# Altium PCB PCB1.PcbDoc
Units mm, origin at the board's own origin, x right, y up, seen from the top; angles counter-clockwise.
Board outline 141.5 x 111.5 mm, 2 copper layers (Top Layer, Bottom Layer); 44 components, 29 nets, 120 pads, 4 vias.
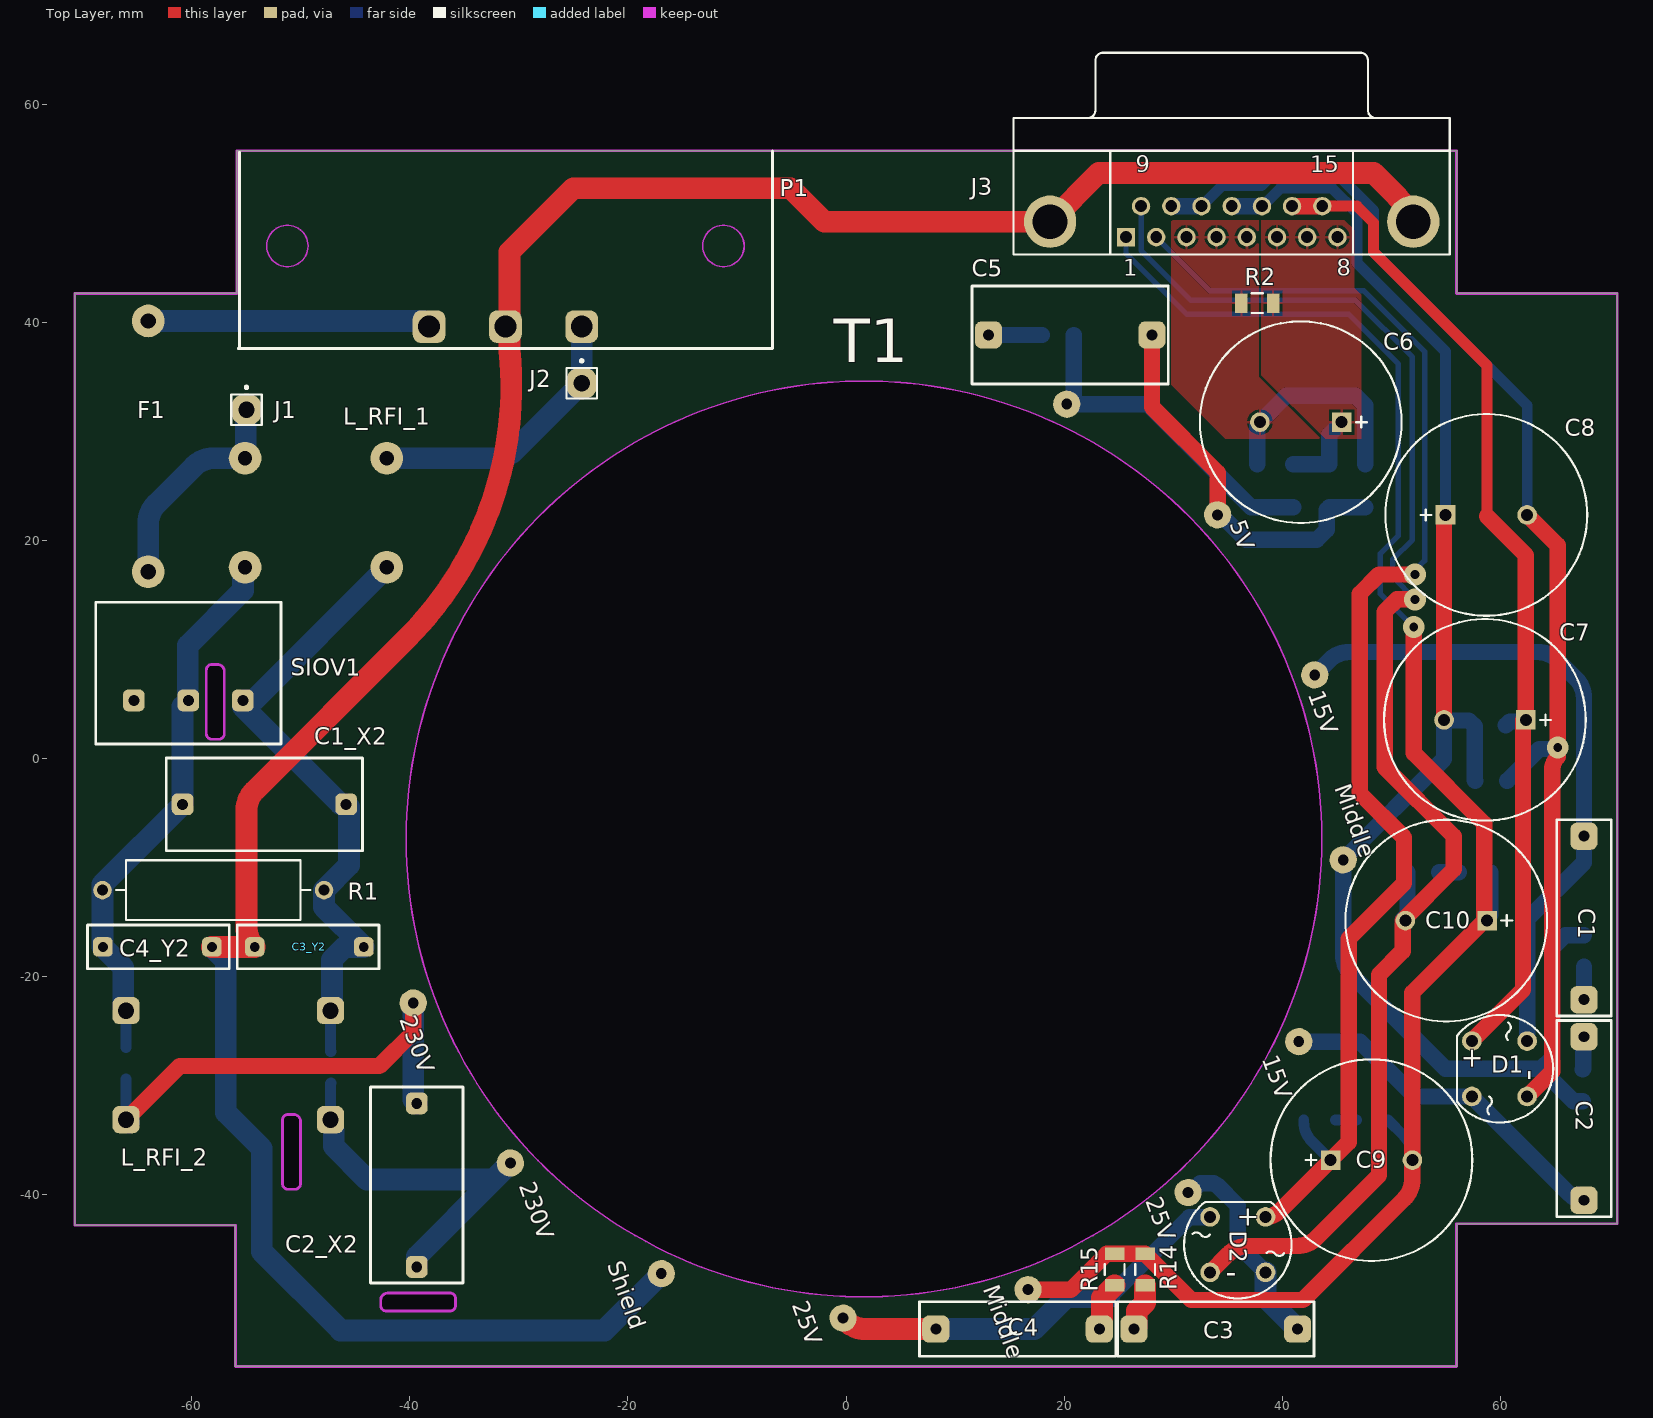
[diagram p0: Top Layer view]
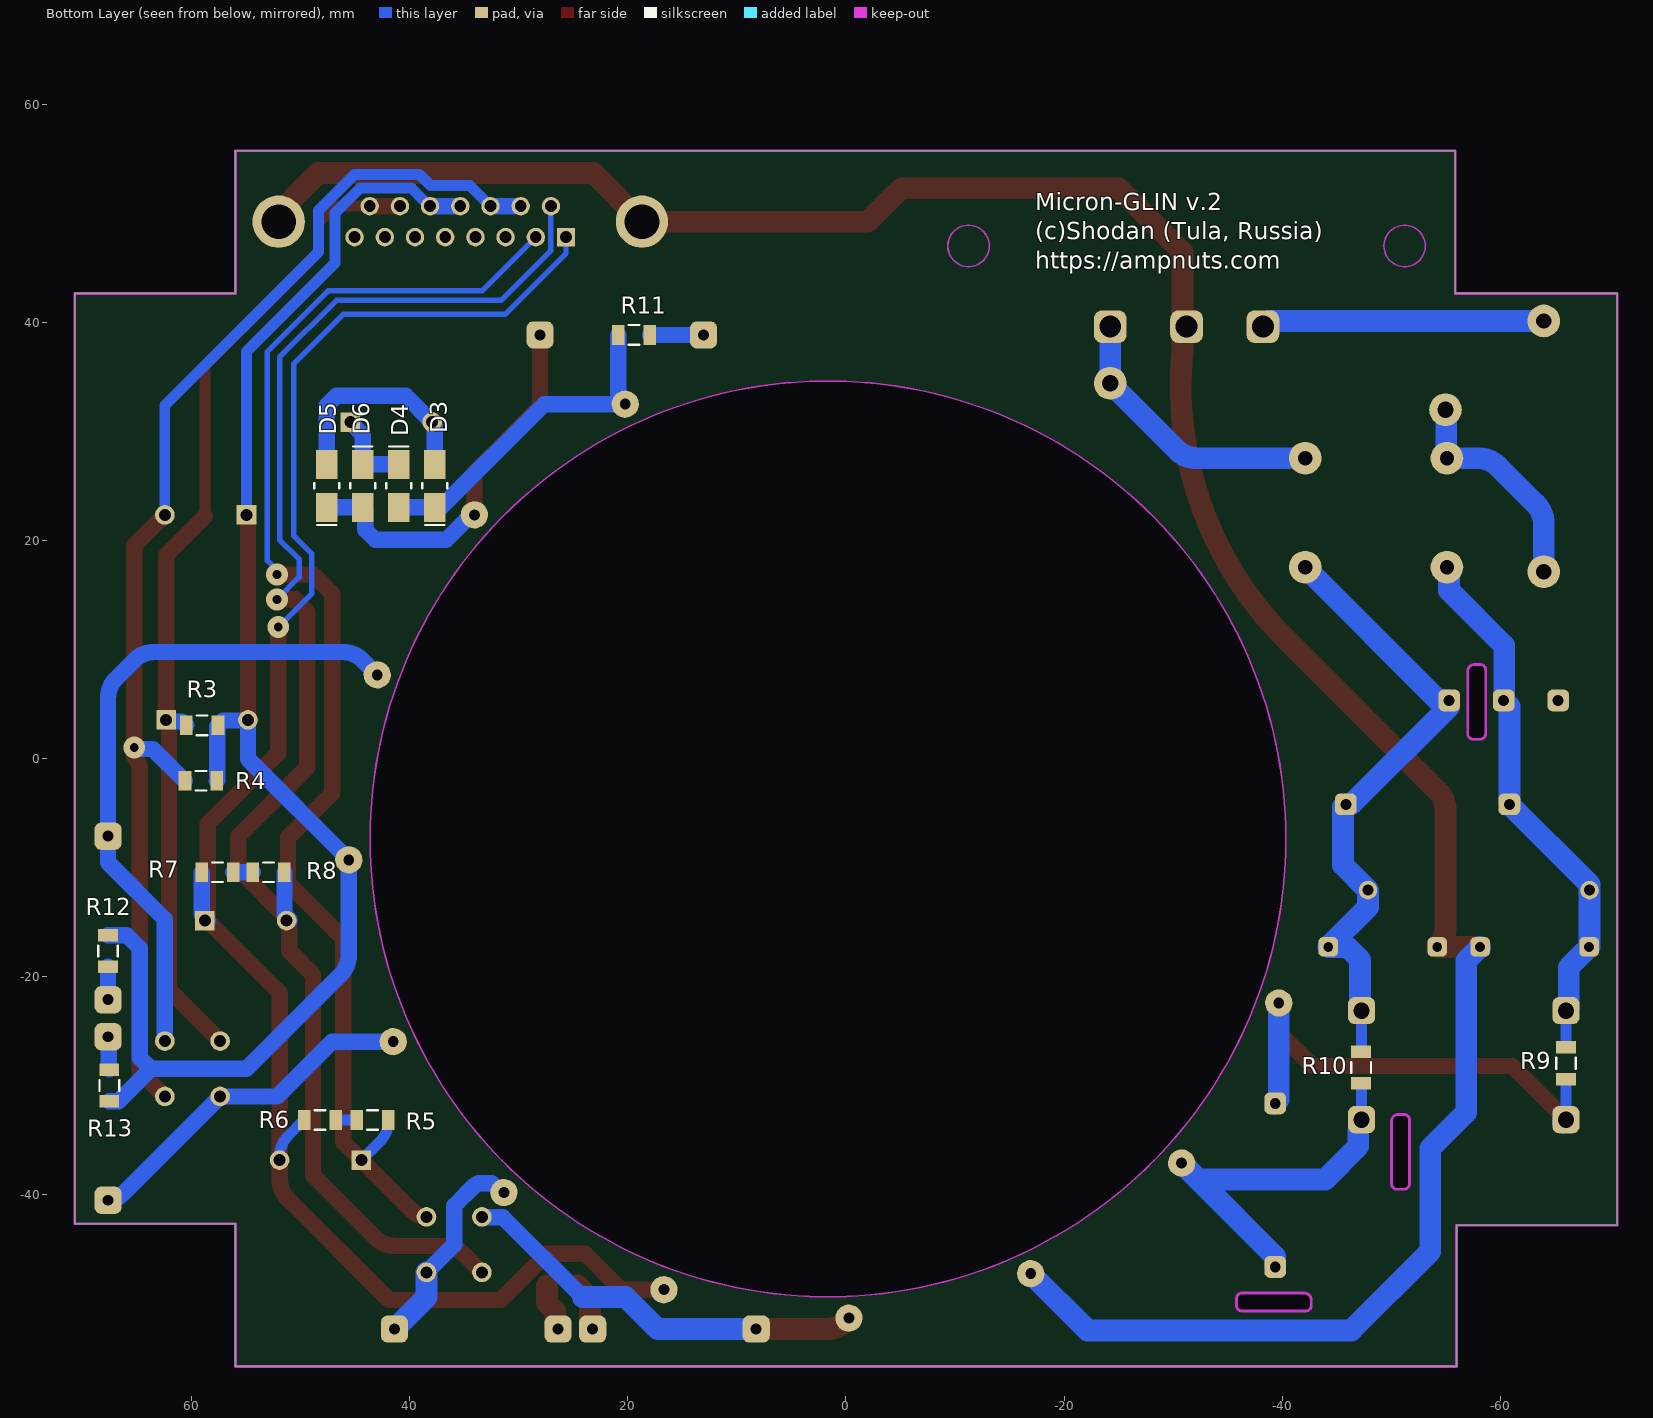
[diagram p1: Bottom Layer view, seen from below]
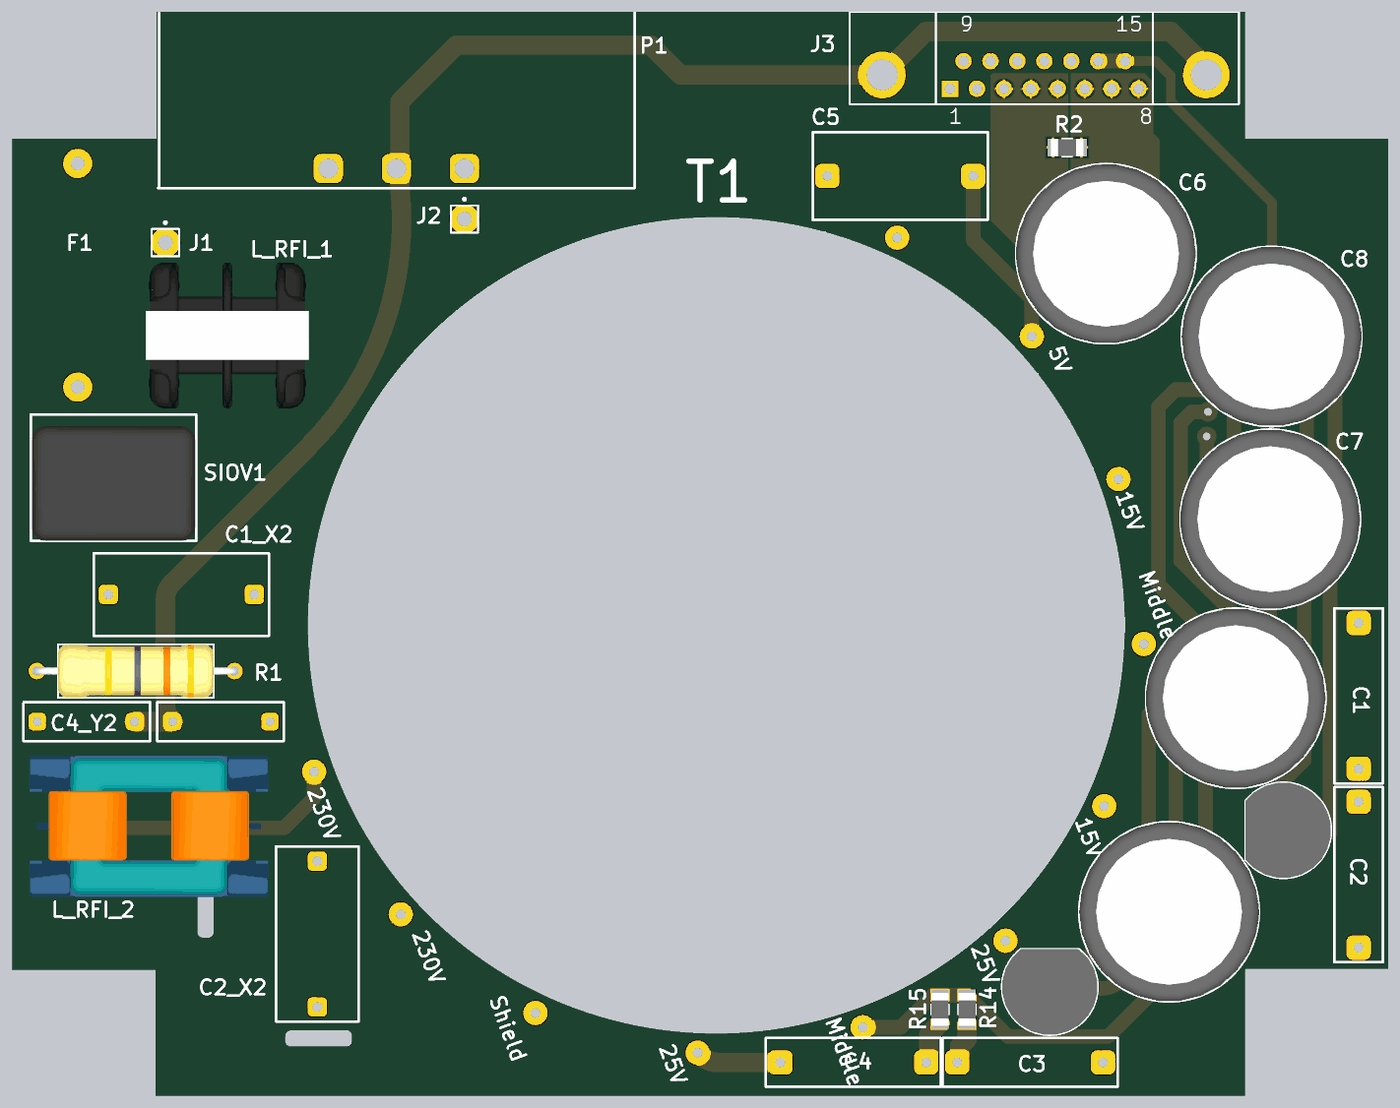
[diagram p2: 3D render of the assembled board from above, using the file's embedded part models]
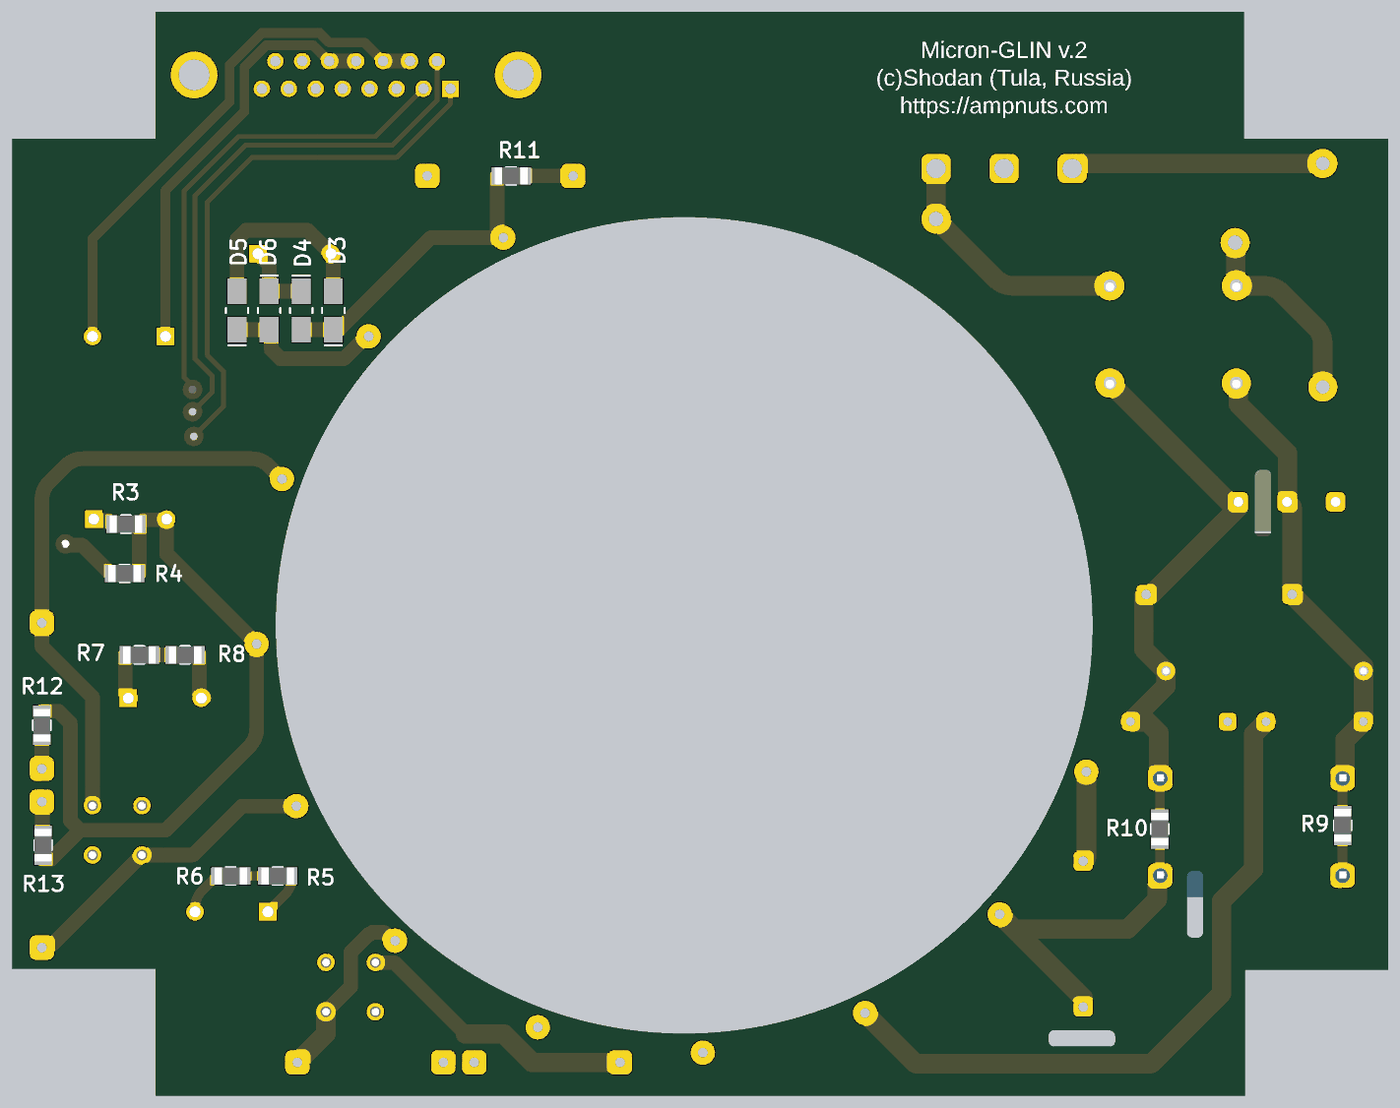
[diagram p3: 3D render of the assembled board from below, using the file's embedded part models]

## Layer stack, top to bottom
Top Solder: solder mask 0.0102, Solder Resist, Dk 3.5
Top Layer: signal copper 0.0356
Dielectric 1: dielectric 0.32, FR-4, Dk 4.8
Bottom Layer: signal copper 0.0356
Bottom Solder: solder mask 0.0102, Solder Resist, Dk 3.5

## Board outline
-56.007,-55.753 -56.007,-42.799 -70.75,-42.799 -70.75,42.672 -55.88,42.672 -55.88,55.75 56.007,55.75 56.007,42.672 70.75,42.672 70.75,-42.672 56.007,-42.672 56.007,-55.75
cut-out: -40.349,-7.366 ccw(c1.651,-7.366) 1.651,-49.366 ccw(c1.651,-7.366) 43.651,-7.366 ccw(c1.651,-7.366) 1.651,34.634 ccw(c1.651,-7.366)
cut-out: -36.322,-50.673 -42.164,-50.673 cw(c-42.164,-50.165) -42.672,-50.165 -42.672,-49.657 cw(c-42.037,-49.657) -42.037,-49.022 -36.322,-49.022 cw(c-36.322,-49.53) -35.814,-49.53 -35.814,-50.165 cw(c-36.322,-50.165)
cut-out: -51.689,-38.989 -51.689,-33.147 cw(c-51.181,-33.147) -51.181,-32.639 -50.673,-32.639 cw(c-50.673,-33.274) -50.038,-33.274 -50.038,-38.989 cw(c-50.546,-38.989) -50.546,-39.497 -51.181,-39.497 cw(c-51.181,-38.989)
cut-out: -58.674,2.286 -58.674,8.128 cw(c-58.166,8.128) -58.166,8.636 -57.658,8.636 cw(c-57.658,8.001) -57.023,8.001 -57.023,2.286 cw(c-57.531,2.286) -57.531,1.778 -58.166,1.778 cw(c-58.166,2.286)

## Design rules (kind name [scope] priority, off if disabled: settings)
Clearance [All] p1: gap=0.254 ignorepadtopadclearanceinfootprint=FALSE except(0: Arc-Hole Track-Hole SMDPad-Hole THPad-Hole Via-Hole Fill-Hole Poly-Hole Region-Hole Text-Hole)
Height [All] p1: minheight=0 maxheight=40 prefheight=12.7
PolygonConnect [All] p1: connectstyle=Relief reliefconductorwidth=0.254 reliefentries=4 polygonreliefangle="90 Angle" airgapwidth=0.254
RoutingVias [All] p1: holewidth=0.711 width=1.27 viastyle="Through Hole" minholewidth=0.711 minwidth=1.27 maxholewidth=0.711 maxwidth=1.27
SolderMaskExpansion [All] p1: expansion=0.102 istentingtop=FALSE
Width [All] p1: maxlimit=4 minlimit=0.254 preferedwidth=2
29 further rules are at their usual default settings.

## Components (designator, comment, footprint, x,y, rotation, side; value= is the part's Value field where it differs from the comment)
C1 "1uF 63VAC" B32522C1105 67.691,-22.112 r90 top
C1_X2 "B32922C3104K 100nF" B32922D3334K -45.847,-4.191 r180 top value=330nF
C2 "1uF 63VAC" B32522C1105 67.691,-40.513 r90 top
C2_X2 "B32922C3104K 100nF" B32922D3334K -39.37,-46.623 r90 top value=330nF
C3 "1uF 63VAC" B32522C1105 26.416,-52.324 r0 top
C3_Y2 "B32021A3152 1.5nF" B32021A3152 -54.229,-17.272 r0 top value=330nF
C4 "1uF 63VAC" B32522C1105 8.241,-52.324 r0 top
C4_Y2 "B32021A3152 1.5nF" B32021A3152 -58.166,-17.272 r180 top value=330nF
C5 "1uF 63VAC" B32522C1475 28.067,38.862 r180 top
C6 "6800uF 16V" CAPPR750-1850X3750 41.716,30.861 r180 top
C7 "2200uF 50V" CAPPR750-1850X3750 58.607,3.556 r180 top
C8 "2200uF 50V" CAPPR750-1850X3750 58.734,22.352 r0 top
C9 "470uF 100V" CAPPR750-1850X3750 48.2,-36.83 r0 top
C10 "470uF 100V" CAPPR750-1850X3750 55.058,-14.859 r180 top
D1 "2W10G-E4/51" VISHAY_WOG 59.944,-28.448 r90 top
D2 "2W10G-E4/51" VISHAY_WOG 35.941,-44.577 r0 top
D3 "PMEG4050EP" PMEG4050EP 37.719,25.019 r90 bottom
D4 "PMEG4050EP" PMEG4050EP 41.021,25.019 r270 bottom
D5 "PMEG4050EP" PMEG4050EP 47.625,25.019 r90 bottom
D6 "PMEG4050EP" PMEG4050EP 44.323,25.019 r270 bottom
F1 "Fuse 0.5A" FUSE -64.008,40.145 r270 top
J1 "Socket" PIN1 -54.991,32.004 r0 top
J2 "Socket" PIN1 -24.242,34.432 r0 top
J3 "D Connector 15" DSUB1.385-2H15 35.378,58.753 r0 top locked
L_RFI_1 "PLA10AN2221R5R2B" PLA10AN2221R5R2B -55.118,17.559 r90 top
L_RFI_2 "B82732F2601B001" B82732F -47.29,-33.114 r180 top
P1 "Plug AC Male" AS-205 -31.242,39.624 r0 top
R1 "1M 2W" RES_TYCO_CFR200 -58.039,-12.065 r180 top
R2 "2k4 1206" RESC3216X65N 37.719,41.783 r0 top
R3 "6k8 1206" RESC3216X65N 59.055,3.048 r0 bottom
R4 "6k8 1206" RESC3216X65N 59.182,-2.032 r180 bottom
R5 "6k8 1206" RESC3216X65N 43.434,-33.147 r180 bottom
R6 "6k8 1206" RESC3216X65N 48.26,-33.147 r180 bottom
R7 "6k8 1206" RESC3216X65N 57.658,-10.414 r0 bottom
R8 "6k8 1206" RESC3216X65N 52.959,-10.414 r0 bottom
R9 "DNI (1206)" RESC3216X65N -66.04,-27.94 r270 bottom
R10 "DNI (1206)" RESC3216X65N -47.244,-28.321 r270 bottom
R11 "10R (1206)" RESC3216X65N 19.431,38.862 r0 bottom
R12 "10R (1206)" RESC3216X65N 67.691,-17.653 r270 bottom
R13 "10R (1206)" RESC3216X65N 67.564,-29.972 r90 bottom
R14 "10R (1206)" RESC3216X65N 27.432,-46.863 r270 top
R15 "10R (1206)" RESC3216X65N 24.638,-46.863 r270 top
SIOV1 "B72214T2271K105" B72214T2271K105 -60.325,5.334 r0 top
T1 "OCM T/230/E/50-25/30-15/5-0.025-50-II" "OCM T/230/E/50-25/30-15/5-0.025-50-II" 1.651,-7.366 r290 top locked

## Footprints (in the part's own frame and the unit in brackets; to place one, negate y for a bottom-side part, rotate by r counter-clockwise, add the part's x,y. Pads: shape width x height; smd on the part's side, far side on the other; paste and mask are expansions set on the pad)
AS-205 [mm]
  rrect50% 3x3 hole 2: 1(-7,0) 2(7,0) 3(0,0)
  Keep-Out Layer circle w0.15: c20,7.4 r1.9
  Keep-Out Layer circle w0.15: c-20,7.4 r1.9
  silkscreen extent -24.5,-2 24.5,16.1
B32021A3152 [mm]
  rrect50% 1.8x1.8 hole 0.9: 1(0,0) 2(10,0)
  silkscreen extent -1.6,-2 11.4,2, body extent -1.7,-2 11.3,2, height 9
B32522C1105 [mm]
  rrect50% 2.5x2.5 hole 1: 1(0,0) 2(15,0)
  silkscreen extent -1.5,-2.5 16.5,2.5, body extent -1.5,-2.5 16.4,2.5, height 10.5
B32522C1475 [mm]
  rrect50% 2.5x2.5 hole 1: 1(0,0) 2(15,0)
  silkscreen extent -1.5,-4.5 16.5,4.5, body extent -1.45,-4.5 16.45,4.4, height 17.5
B32922D3334K [mm]
  rrect50% 2x2 hole 1: 1(0,0) 2(15,0)
  silkscreen extent -1.49,-4.25 16.51,4.26, body extent -1.5,-4.3 16.5,4.3, height 14.5
B72214T2271K105 [mm]
  rrect50% 2x2 hole 1: 1(5,0) 2(-5,0) 3(0,0)
  silkscreen extent -8.5,-4 8.5,9, body extent -8.4,-4 8.4,7.8, height 21.8
B82732F [mm]
  rrect50% 2.5x2.5 hole 1.5: 1(0,0) 2(0,-10) 3(18.75,-10) 4(18.75,0)
  body extent -2.86,-12.33 21.64,2.17, height 14.1
CAPPR750-1850X3750 [mm] "Capacitor, Radial, Pin spacing 7.5mm - Body Diameter 18.5mm X Body  Height 37.5mm"
  rect 1.8x1.8 hole 1.1: 1(-3.75,0)
  round 1.8 hole 1.1: 2(3.75,0)
  silkscreen extent -9.25,-9.25 9.25,9.25, body extent -9.25,-9.22 9.25,9.22, height 37.5
DSUB1.385-2H15 [mm] "Connector; D Subminiature; 15 Position; Right Angle; Pitch 1.385 mm"
  rect 1.69x1.69 hole 1.09: 1(-9.695,-10.92)
  round 1.69 hole 1.09: 2(-6.925,-10.92) 3(-4.155,-10.92) 4(-1.385,-10.92) 5(1.385,-10.92) 6(4.155,-10.92) 7(6.925,-10.92) 8(9.695,-10.92) 9(-8.31,-8.08) 10(-5.54,-8.08) 11(-2.77,-8.08) 12(0,-8.08) 13(2.77,-8.08) 14(5.54,-8.08) 15(8.31,-8.08)
  round 4.8 hole 3.18: 16(-16.66,-9.5) 17(16.66,-9.5)
  silkscreen extent -20,-12.5 20,6
FUSE [mm]
  round 3 hole 1.4: 1(0,0) 2(23,0)
  body extent -1.95,-5.32 25.05,5.18, height 16
"OCM T/230/E/50-25/30-15/5-0.025-50-II" [mm]
  round 2.5 hole 1: 1(0,-44) 2(16.838,-40.651) 3(31.113,-31.113) 4(40.651,-16.838) 5(44,0) 6(40.651,16.838) 7(31.113,31.113) 8(16.838,40.651) 9(0,44) 10(-16.838,40.651) 11(-31.113,31.113)
  Keep-Out Layer circle w0.15: c0,0 r42
  body extent 4.5,-44.2 6.3,-43.1, height 1.27
PIN1 [mm] "Generic Antenna; 1 Lead"
  round 3 hole 1.5: 1(0,0)
  silkscreen extent -1.4,-1.4 1.4,2.17
PLA10AN2221R5R2B [mm]
  round 3 hole 1.3: 1(0,0) 2(10,0) 3(10,-13) 4(0,-13)
  body extent -2.6,-14.88 12.4,1.91, height 16.3
PMEG4050EP [mm] "Molded Diode, 2-Leads, Body 4,7x2,5mm, IPC Low Density"
  rect 2.65x1.95 smd: 1(-1.975,0) 2(1.975,0)
  silkscreen extent -3.6,-1.15 0.25,1.15, body extent -2.5,-1.15 2.5,1.15, height 1.1
RES_TYCO_CFR200 [mm] "Resistor, Axial, Pad spacing 20.32mm - Body Lengh 16mm X Body Diameter 5.5mm"
  round 1.7 hole 1: 1(-10.16,0) 2(10.16,0)
  silkscreen extent -8.91,-2.75 8.91,2.75, body extent -10.53,-2.75 10.54,2.75, height 5.5
RESC3216X65N [mm] "Chip Resistor, EIA 1206, Metric 3216, Body 3.2x1.6mm, IPC Medium Density"
  rect 1.15x1.8 smd: 1(-1.45,0) 2(1.45,0)
  silkscreen extent -0.5,-0.9 0.5,0.9, body extent -1.67,-0.87 1.68,0.88, height 0.65
VISHAY_WOG [mm] "Bridge Rectifier, Body 9.35m x 8.33mm, VISHAY Case Type WOG"
  round 1.8 hole 1.1: 1(2.54,2.54) 2(2.54,-2.54) 3(-2.54,-2.54) 4(-2.54,2.54)
  silkscreen extent -4.93,-4.93 4.93,3.91, body extent -4.93,-4.93 4.93,3.91, height 13.5

## Part data
C1 C1_X2 C2 C2_X2 C3 C3_Y2 C4 C4_Y2 C5: library part CPPR_330NF_630V_5%_2250-1050X2650X1650, "Non-polarised capacitor", Case="LS22.5 W10.5 x L26.5 x H16.5", Manufacturer=TDK, Manufacturer Part Number=B32653A6334J000, Tolerance=±5%, Voltage=630VDC/250VAC, Author="CERN DEM JLC", Component Type=Standard, ComponentHeight=16.5mm, CreateDate=20.12.2007, HelpURL=\\cern.ch\dfs\Applications\Altium\Datasheets\CPPR_TDK_B32653.pdf, LatestRevisionDate=22.04.2015, Mounted=Yes, Part Description="Metallized Polypropylene Film Capacitor (MKP)", Part Number=CPPR_330NF_630V_5%_2250-1050X2650X1650, Pin Count=2, Sense=No, SMD=No, Socket=No, Status=None
C6 C7 C8 C9 C10: library part CAER_10000UF_16V_20%_CHEMI-CON_EKYB160ELL103MMP1S, "Polarised capacitor", Case="LS7.5 D18 x H35.5", Manufacturer="UNITED CHEMI-CON", Manufacturer Part Number=EKYB160ELL103MMP1S, Tolerance=±20%, Voltage=16V, Author="CERN DEM JLC", Component Type=Standard, ComponentHeight=37mm, CreateDate=02.06.2015, HelpURL=\\cern.ch\dfs\Applications\Altium\Datasheets\CAER_CHEMI-CON_KYB.pdf, LatestRevisionDate=02.06.2015, Mounted=Yes, Part Description="Z=0R012 Miniature Aluminium Electrolytic Capacitor", Part Number=CAER_10000UF_16V_20%_CHEMI-CON_EKYB160ELL103MMP1S, Pin Count=2, Sense=Yes, SMD=No, Socket=No, Status=None
D1 D2: library part W005G-E4/51, "Bridge Rectifier 1+ 2AC 3- 4AC", Manufacturer="VISHAY GENERAL SEMICONDUCTOR", Power=1.5A, Voltage=50V, Author="CERN DEM JLC", Bonding=No, Component Type=Standard, ComponentHeight=13.5mm, CreateDate=20.09.2011, Device=2W10G-E4/51, HelpURL=\\cern.ch\dfs\Applications\Altium\Datasheets\W005G-E4-51.pdf, LatestRevisionDate=08.04.2016, Manufacturer Part Number=W005G-E4/51, Mounted=Yes, PackageDescription="Bridge Rectifier, Body 9.35m x 8.33mm, VISHAY Case Type WOG", Part Description="Glass Passivated Single-Phase Bridge Rectifier", Part Number=W005G-E4/51, Pin Count=4, PressFit=No, Sense=No, SMD=No, Socket=No
F1: library part "Fuse 1", "Fuse", LatestRevisionDate=17-Jul-2002, LatestRevisionNote="Re-released for DXP Platform.", PackageDescription="Thru-Hole; 2 Leads", PackageReference=PIN-W2/E2.8, Published=8-Jun-2000, Publisher="Altium Limited"
J3: "Receptacle Assembly, 15 Position, Right Angle", PackageDocument=O, DatasheetDocument=1-Sep-99, Gender=Receptacle, LatestRevisionDate=17-Jul-2002, LatestRevisionNote="Re-released for DXP Platform.", Orientation="Right Angle", PackageReference=788757, Positions=15, Published=15-Jun-2001, Publisher="Altium Limited"
L_RFI_2: library part PLA10AN2221R5R2B
P1: "IEC Mains Power Inlet, EN60 320-1 C14 Class I Cold Condition, PC Flange Rear Mount, Chassis Plug", MaximumRating="10A, 250V a.c. (UL & CSA 15A, 250V a.c.)", PackageDocument="ver.80, 15-Sep-2003", ComponentLink1Description="Manufacturer Link", ComponentLink1URL=http://www.bulgin.co.uk/, DatasheetDocument="ver.80, 15-Sep-2003", DrillSize="Corresponds to nominal value.", LatestRevisionDate=15-Jul-2004, LatestRevisionNote="Component Replaced.", MountingFixtures="Not drawn on schematic symbol.", Note="IEC Color Scheme employed for L, N and E.", PackageReference=PX0580/PC, PCB_Layout="Complies with manufacturer's recommendation.", Published=15-Jul-2004, Publisher="Altium Limited", Terminations="P.C. Spills"
R1: library part RCF_NO-VALUE_5%_2W_0-450PPM_TYCO_CFR200, "Resistor - 5%", Case="LS20.32 L16 x D5.5", Manufacturer="TYCO ELECTRONICS", Manufacturer Part Number=CFR200J, Power=2W, Tolerance=±5%, Author="CERN DEM JLC", Component Type=Standard, ComponentHeight=5.5mm, CreateDate=10.03.2014, HelpURL=\\cern.ch\dfs\Applications\Altium\Datasheets\RCF_TYCO_CFR200.pdf, LatestRevisionDate=03.06.2014, Mounted=No, Part Description="Carbon Film Fixed Resistor - CFR  Series", Part Number=RCF_NO-VALUE_5%_2W_0-450PPM_TYCO_CFR200, Pin Count=2, PressFit=No, Sense=No, SMD=No, Socket=No, Status=None, TC="0 -450ppm/°C"
R2 R3 R4 R5 R6 R7 R8 R9 R10 R11 R12 R13 R14 R15: library part R1206_2K4_1%_0.25W_100PPM, "Resistor - 1%", Case=1206, Manufacturer=GENERIC, Manufacturer1 ComponentHeight=0.65mm, Manufacturer1 Example="NIC COMPONENT", Manufacturer1 Part Number=NRC12F2401TRF, Power=0.25W, Tolerance=±1%, Author="CERN DEM JLC", Component Type=Standard, CreateDate=03.12.2007, HelpURL=\\cern.ch\dfs\Applications\Altium\Datasheets\R1206_NIC_NRC.pdf, LatestRevisionDate=13.03.2008, Manufacturer Part Number=R1206_2K4_1%_0.25W_100PPM, Mounted=Yes, Part Description="General Purpose Thick Film Chip Resistor", Part Number=R1206_2K4_1%_0.25W_100PPM, Pin Count=2, PressFit=No, Sense=No, SMD=Yes, Socket=No, Status=Preferred, TC=±100ppm/°C
J1 J2: LatestRevisionDate=17-Jul-2002, LatestRevisionNote="Re-released for DXP Platform.", Publisher="Altium Limited"
SIOV1: LatestRevisionDate=29-May-2009, LatestRevisionNote="IPC-7351 Footprint Added.", Order=B72214T2271K105, PackageDescription="Chip Resistor", PackageReference=J1-0603, Published=8-Jun-2000, Publisher="Altium Limited"

## Via types
v1: diameter 2, hole 0.8, Top Layer to Bottom Layer, tented both sides, 4 vias

## Nets (pads, with @x,y where several pads share a name; then routed paths per layer and width w, separated by ;. In a path a pad name is that pad's centre, name@x,y a point inside that pad or via, vN(x,y) a via of type N, cw(c..) or ccw(c..) an arc to the next point about the centre after c; other vN are vias at no path point)
+7V_unreg: C6.1 D4.1 D6.1 J3.6 J3.7 J3.8 R2.2 | length 7.6
  Bottom Layer w1.5: D4.1 D6.1 44.323,29.718 C6.1
+22V_unreg: C7.1 D1.1 J3.14 J3.15 R3.2 | length 93
  Top Layer w1: J3.15 46.863,50.673 48.387,49.149 48.387,46.482 58.801,36.068 58.801,22.225
  Top Layer w1.5: J3.14 J3.15 ; D1.1 62.103,-21.209 C7.1@62.103,3.556 ; 58.801,22.225 62.357,18.669 C7.1
  Bottom Layer w1.5: R3.2 60.53,3.048 60.888,3.406 62.207,3.406 C7.1
+36V_unreg: C9.1 D2.1 J3.2 R5.2 | length 124.7
  Top Layer w1.5: D2.1 ccw(c38.481,-40.197) 39.782,-41.498 46.101,-35.179 46.101,-16.51 51.181,-11.43 51.181,-7.239 47.117,-3.175 47.117,15.113 48.895,16.891 v1(52.197,16.891)
  Bottom Layer w0.5: J3.2 33.371,42.915 47.509,42.915 53.086,37.338 53.086,18.161 52.197,17.272 v1(52.197,16.891)
  Bottom Layer w1: R5.2 41.984,-33.312 ccw(c44.524,-33.312) 42.728,-35.108 C9.1
-22V_unreg: C8.2 D1.3 J3.10 J3.11 R4.1 | length 116.1
  Top Layer w1.5: D1.3 64.77,-28.702 64.77,-1.047 cw(c66.504,-1.047) 65.278,0.18 v1(65.278,1.016) 65.278,19.558 C8.2
  Bottom Layer w1: J3.11 34.513,52.578 38.108,52.578 39.108,53.578 45.096,53.578 48.387,50.287 48.387,46.482 62.484,32.385 C8.2
  Bottom Layer w1.5: J3.10 J3.11 ; R4.1 60.657,-2.032 63.578,0.889 64.897,0.889 v1@65.024,1.016
-36V_unreg: C10.2 D2.3 J3.9 R8.1 | length 140.8
  Top Layer w1.5: D2.3 35.07,-45.448 cw(c36.866,-47.244) 36.866,-44.704 41.366,-44.704 ccw(c41.366,-42.164) 43.162,-43.96 48.895,-38.227 48.895,-19.812 51.054,-17.653 51.054,-14.859 55.753,-10.16 55.753,-7.112 49.403,-0.762 49.403,13.462 50.546,14.605 v1(52.197,14.605)
  Bottom Layer w0.5: J3.9 27.068,46.609 31.64,42.037 46.736,42.037 51.943,36.83 51.943,20.066 50.165,18.288 50.165,16.637 v1(52.197,14.605)
  Bottom Layer w1.5: C10.2@51.054,-14.859 51.054,-14.778 51.509,-14.323 R8.1
AGND_22: C7.2 C8.1 J3.12 J3.13 R3.1 R4.2 R12.1 R13.1 T1.8 | length 139.4
  Top Layer w1.5: C7.2 54.857,22.225 C8.1
  Bottom Layer w1: J3.13@38.199,50.673 39.85,52.324 44.577,52.324 46.863,50.038 46.863,45.466 54.984,37.345 C8.1
  Bottom Layer w1.5: J3.12 J3.13 J3.13@38.199,50.673 ; R4.2 57.669,-1.968 57.669,2.984 R3.1 57.58,3.048 57.129,3.499 54.914,3.499 C7.2 54.857,-0.037 T1.8 45.609,-18.014 ccw(c48.149,-18.014) 46.353,-19.81 54.991,-28.448 63.754,-28.448 ; R13.1 66.728,-31.422 63.754,-28.448 ; R12.1 65.966,-16.203 64.772,-17.397 64.772,-27.43 63.754,-28.448
AGND_36: C9.2 C10.1 J3.1 R6.1 R7.2 R14.1 R15.1 T1.5 | length 165.6
  Top Layer w1.5: T1.5 20.63,-48.712 23.929,-45.413 25.908,-45.413 R14.1 31.676,-49.657 41.91,-49.657 51.206,-40.361 ccw(c49.41,-38.565) 51.95,-38.565 C9.2 51.95,-21.463 58.554,-14.859 58.554,-5.976 52.07,0.508 v1(52.07,12.065)
  Bottom Layer w0.5: J3.1 25.683,46.326 31.242,40.767 46.101,40.767 50.673,36.195 50.673,20.447 49.022,18.796 49.022,15.113 v1(52.07,12.065)
  Bottom Layer w1: R6.1 51.206,-34.643 cw(c49.41,-36.439) 51.95,-36.439 C9.2
  Bottom Layer w1.5: C9.2@51.824,-36.778 ccw(c51.95,-36.651) C9.2 ; C10.1@58.554,-14.859 59.108,-14.305 R7.2
DGND: C6.2 D3.2 D5.2 J3.3 J3.4 J3.5 R2.1 | length 20.4
  Bottom Layer w1.5: D3.2 37.719,30.533 37.966,30.78 C6.2 40.379,33.274 46.736,33.274 47.625,32.385 D5.2
NetC1_1: C1.1 R12.2 | length 3
  Bottom Layer w1.5: C1.1 R12.2
NetC1_2: C1.2 D1.2 T1.9 | length 61.2
  Bottom Layer w1.5: T1.9 44.35,9.035 cw(c46.146,7.239) 46.146,9.779 63.464,9.779 cw(c63.464,7.239) 65.26,9.035 66.947,7.348 cw(c65.151,5.552) 67.691,5.552 67.691,-9.525 62.484,-14.732 D1.2
NetC1_X2_1: C1_X2.1 C3_Y2.2 L_RFI_1.4 L_RFI_2.2 R1.1 R10.1 SIOV1.1 | length 59.6
  Bottom Layer w1: L_RFI_2.2 -47.267,-23.137 -47.267,-26.848 R10.1
  Bottom Layer w2: L_RFI_2.2 -47.15,-22.974 -47.15,-18.444 -45.978,-17.272 C3_Y2.2 -47.879,-13.622 R1.1 -45.593,-9.779 -45.593,-4.445 C1_X2.1 -46.355,-4.191 -55.325,4.779 SIOV1.1 -54.343,5.334 L_RFI_1.4
NetC1_X2_2: C1_X2.2 C4_Y2.2 L_RFI_1.1 L_RFI_2.3 R1.2 R9.1 SIOV1.3 | length 50.6
  Bottom Layer w1: R9.1 L_RFI_2.3
  Bottom Layer w2: L_RFI_2.3 -66.29,-22.864 -66.29,-19.148 C4_Y2.2 -68.199,-17.239 R1.2 -68.199,-11.543 C1_X2.2 -60.847,4.812 SIOV1.3 ; SIOV1.3@-60.372,5.16 -60.372,10.367 -55.309,15.43 -55.309,17.368 L_RFI_1.1
NetC2_1: C2.1 D1.4 T1.7 | length 32.8
  Bottom Layer w1.5: T1.7 47.143,-25.961 52.17,-30.988 D1.4 66.39,-39.974 ccw(c67.691,-38.673) C2.1 C2.1@67.191,-40.013
NetC2_2: C2.2 R13.2 | length 3.1
  Bottom Layer w1.5: R13.2 67.627,-28.459 67.627,-25.576 C2.2
NetC2_X2_1: C2_X2.1 L_RFI_2.1 R10.2 T1.2 | length 34.9
  Bottom Layer w1: L_RFI_2.1 -47.267,-33.091 -47.267,-29.794 R10.2
  Bottom Layer w2: L_RFI_2.1@-47.04,-33.114 -47.04,-34.084 -46.99,-34.134 -46.99,-35.56 -43.942,-38.608 -32.305,-38.608 ; C2_X2.1 -39.37,-45.673 -32.305,-38.608 ; T1.2 -32.305,-38.608
NetC2_X2_2: C2_X2.2 L_RFI_2.4 R9.2 T1.1 | length 45.7
  Top Layer w1.5: L_RFI_2.4 -61.12,-28.194 -42.799,-28.194 -39.695,-25.09 T1.1
  Bottom Layer w1: L_RFI_2.4 R9.2
  Bottom Layer w2: L_RFI_2.4@-65.79,-33.114 -65.79,-33.364 L_RFI_2.4@-65.763,-33.391 ; T1.1 -39.695,-31.298 C2_X2.2
NetC3_1: C3.1 R14.2 | length 4.4
  Top Layer w2: C3.1 26.666,-52.074 26.666,-50.677 27.432,-49.911 R14.2
NetC3_2: C3.2 D2.2 T1.6 | length 19.7
  Bottom Layer w1.5: T1.6 31.648,-39.806 32.502,-38.952 33.745,-38.952 33.909,-39.116 34.036,-39.116 35.941,-41.021 35.941,-44.577 D2.2
  Bottom Layer w2: D2.2 38.481,-49.389 C3.2 C3.2@41.674,-52.066
NetC4_1: C4.1 D2.4 T1.4 | length 38.2
  Top Layer w2: T1.4 -0.012,-51.58 ccw(c1.784,-49.784) 1.784,-52.324 C4.1
  Bottom Layer w1.5: 24.144,-49.389 31.473,-42.06 33.378,-42.06 D2.4
  Bottom Layer w2: C4.1 17.272,-52.324 20.207,-49.389 24.144,-49.389
NetC4_2: C4.2 R15.2 | length 4.6
  Top Layer w2: C4.2 23.491,-52.074 23.491,-49.46 R15.2
NetC5_1: C5.1 D5.1 D6.2 T1.10 | length 35.8
  Top Layer w1.5: C5.1 28.067,32.258 34.091,26.234 T1.10
  Bottom Layer w1.5: T1.10 34.362,22.36 36.656,20.066 43.18,20.066 44.098,20.984 44.098,22.819 D6.2 D5.1
NetC5_2: C5.2 R11.1 | length 4.9
  Bottom Layer w1.5: C5.2 R11.1
NetD3_1: D3.1 D4.2 R11.2 T1.11 | length 31.3
  Bottom Layer w1.5: R11.2 20.881,33.417 20.246,32.782 T1.11 27.686,32.512 37.154,23.044 D3.1 D4.2
NetF1_1: F1.1 P1.1 | length 26
  Bottom Layer w2: F1.1 -38.763,40.145 P1.1
NetF1_2: F1.2 J1.1 L_RFI_1.2 | length 20.7
  Bottom Layer w2: F1.2 -64.008,21.554 cw(c-61.468,21.554) -63.264,23.35 -59.799,26.815 cw(c-58.003,25.019) -58.97,27.368 cw(c-58.003,25.019) -58.003,27.559 L_RFI_1.2 -55.054,27.622 -55.054,31.941 J1.1
NetJ2_1: J2.1 L_RFI_1.3 P1.2 | length 25.8
  Bottom Layer w2: L_RFI_1.3 -32.167,27.559 ccw(c-32.167,30.099) -30.371,28.303 J2.1 P1.2
NetR5_1: R5.1 R6.2 | length 1.9
  Bottom Layer w1: R5.1 R6.2
NetR7_1: R7.1 R8.2 | length 1.8
  Bottom Layer w1.5: R8.2 R7.1
PE: C3_Y2.1 C4_Y2.1 J3.16 J3.17 P1.3 T1.3 | length 238.9
  Top Layer w2: C4_Y2.1 C3_Y2.1 -54.247,-17.254 cw(c-52.451,-15.458) -54.991,-15.458 -54.991,-4.735 cw(c-52.451,-4.735) -54.247,-2.939 -40.312,10.996 ccw(c-63.499,34.189) -30.861,37.403 -30.861,46.482 -25.019,52.324 -5.065,52.324 -1.994,49.253 J3.16 23.186,53.721 48.387,53.721 50.638,51.47 50.638,51.411 52.038,50.011 J3.17
  Bottom Layer w2: C4_Y2.1 -56.896,-18.542 -56.896,-32.448 -53.594,-35.75 -53.594,-45.212 -46.355,-52.451 -22.152,-52.451 T1.3
pads on no net: SIOV1.2

## Polygon pours and split planes (outlines as drawn)
DGND on Top Layer "DGND_L01_P001" (solid, pour order 1): 38.1,49.403 29.972,49.403 29.845,49.276 29.845,34.29 34.798,29.337 43.942,29.337 38.1,35.179
+7V_unreg on Top Layer "+7V_UNREG_L01_P000" (solid, pour order 0): 38.1,49.403 45.72,49.403 46.609,48.514 46.609,43.18 47.244,42.545 47.244,29.337 43.942,29.337 38.1,35.179

## Keep-outs
Keep-Out Layer:
  lines w0.254: -70.75,-42.799 -70.75,42.672 ; -70.739,-42.799 -56.007,-42.799 -56.007,-55.753 ; -70.739,42.672 -55.88,42.672 -55.88,55.753 ; -56.007,-55.75 56.007,-55.75 ; -55.88,55.75 56.007,55.75 ; 56.007,-55.753 56.007,-42.672 70.739,-42.672 ; 56.007,55.753 56.007,42.672 70.739,42.672 ; 70.75,-42.672 70.75,42.672 ; -58.674,2.286 ccw(c-58.166,2.286) -58.166,1.778 -57.531,1.778 ccw(c-57.531,2.286) -57.023,2.286 -57.023,5.588 -57.023,8.001 ccw(c-57.658,8.001) -57.658,8.636 -58.166,8.636 ccw(c-58.166,8.128) -58.674,8.128 -58.674,2.286 ; -51.689,-38.989 ccw(c-51.181,-38.989) -51.181,-39.497 -50.546,-39.497 ccw(c-50.546,-38.989) -50.038,-38.989 -50.038,-35.687 -50.038,-33.274 ccw(c-50.673,-33.274) -50.673,-32.639 -51.181,-32.639 ccw(c-51.181,-33.147) -51.689,-33.147 -51.689,-38.989 ; -42.672,-50.165 ccw(c-42.164,-50.165) -42.164,-50.673 -36.322,-50.673 ccw(c-36.322,-50.165) -35.814,-50.165 -35.814,-49.53 ccw(c-36.322,-49.53) -36.322,-49.022 -39.624,-49.022 -42.037,-49.022 ccw(c-42.037,-49.657) -42.672,-49.657 -42.672,-50.165

## Silkscreen, mask and mechanical layers (free items; w line width, h text height)
Bottom Overlay:
  text "Micron-GLIN v.2 / (c)Shodan (Tula, Russia) / https://ampnuts.com" at -17.377,44.371 h2.7

## Text inside footprints (layer, text, board x,y; h text height)
D1: Top Overlay "+" at 58.224,-28.548 h1.8 r90; Top Overlay "-" at 63.464,-29.553 h2 r90; Mechanical 14 "+" at 58.224,-28.548 h1.8 r90; Mechanical 14 "-" at 63.464,-29.553 h2 r90
D2: Top Overlay "+" at 35.841,-42.857 h1.8; Top Overlay "-" at 34.836,-48.097 h2; Mechanical 14 "+" at 35.841,-42.857 h1.8; Mechanical 14 "-" at 34.836,-48.097 h2
J3: Top Overlay "1" at 25.433,44.278 h1.5; Top Overlay "8" at 45.03,44.278 h1.5; Top Overlay "15" at 42.563,53.778 h1.5; Top Overlay "9" at 26.568,53.778 h1.5
T1: Top Overlay "Middle" at 44.779,-2.684 h1.52 r290; Top Overlay "5V" at 35.167,21.538 h1.52 r290; Top Overlay "Shield" at -21.955,-46.432 h1.52 r290; Top Overlay "25V" at 27.442,-40.555 h1.52 r290; Top Overlay "Middle" at 12.566,-48.617 h1.52 r290; Top Overlay "15V" at 42.344,5.925 h1.52 r290; Top Overlay "230V" at -30.003,-39.18 h1.52 r290; Top Overlay "25V" at -4.982,-50.109 h1.52 r290; Top Overlay "230V" at -40.989,-23.923 h1.52 r290; Top Overlay "15V" at 38.126,-27.515 h1.52 r290